# Altium PCB LV-BMS_V3_21E_low-side.PcbDoc (part 2 of 2)
Units mil, origin at the board's own origin, x right, y up, seen from the top; angles counter-clockwise.
Board outline 4867.15 x 1737.62 mil, 4 copper layers (Top Layer, GND, VCC, Bottom Layer), stack 30.634 mil thick; 153 components, 77 nets, 862 pads, 75 vias.
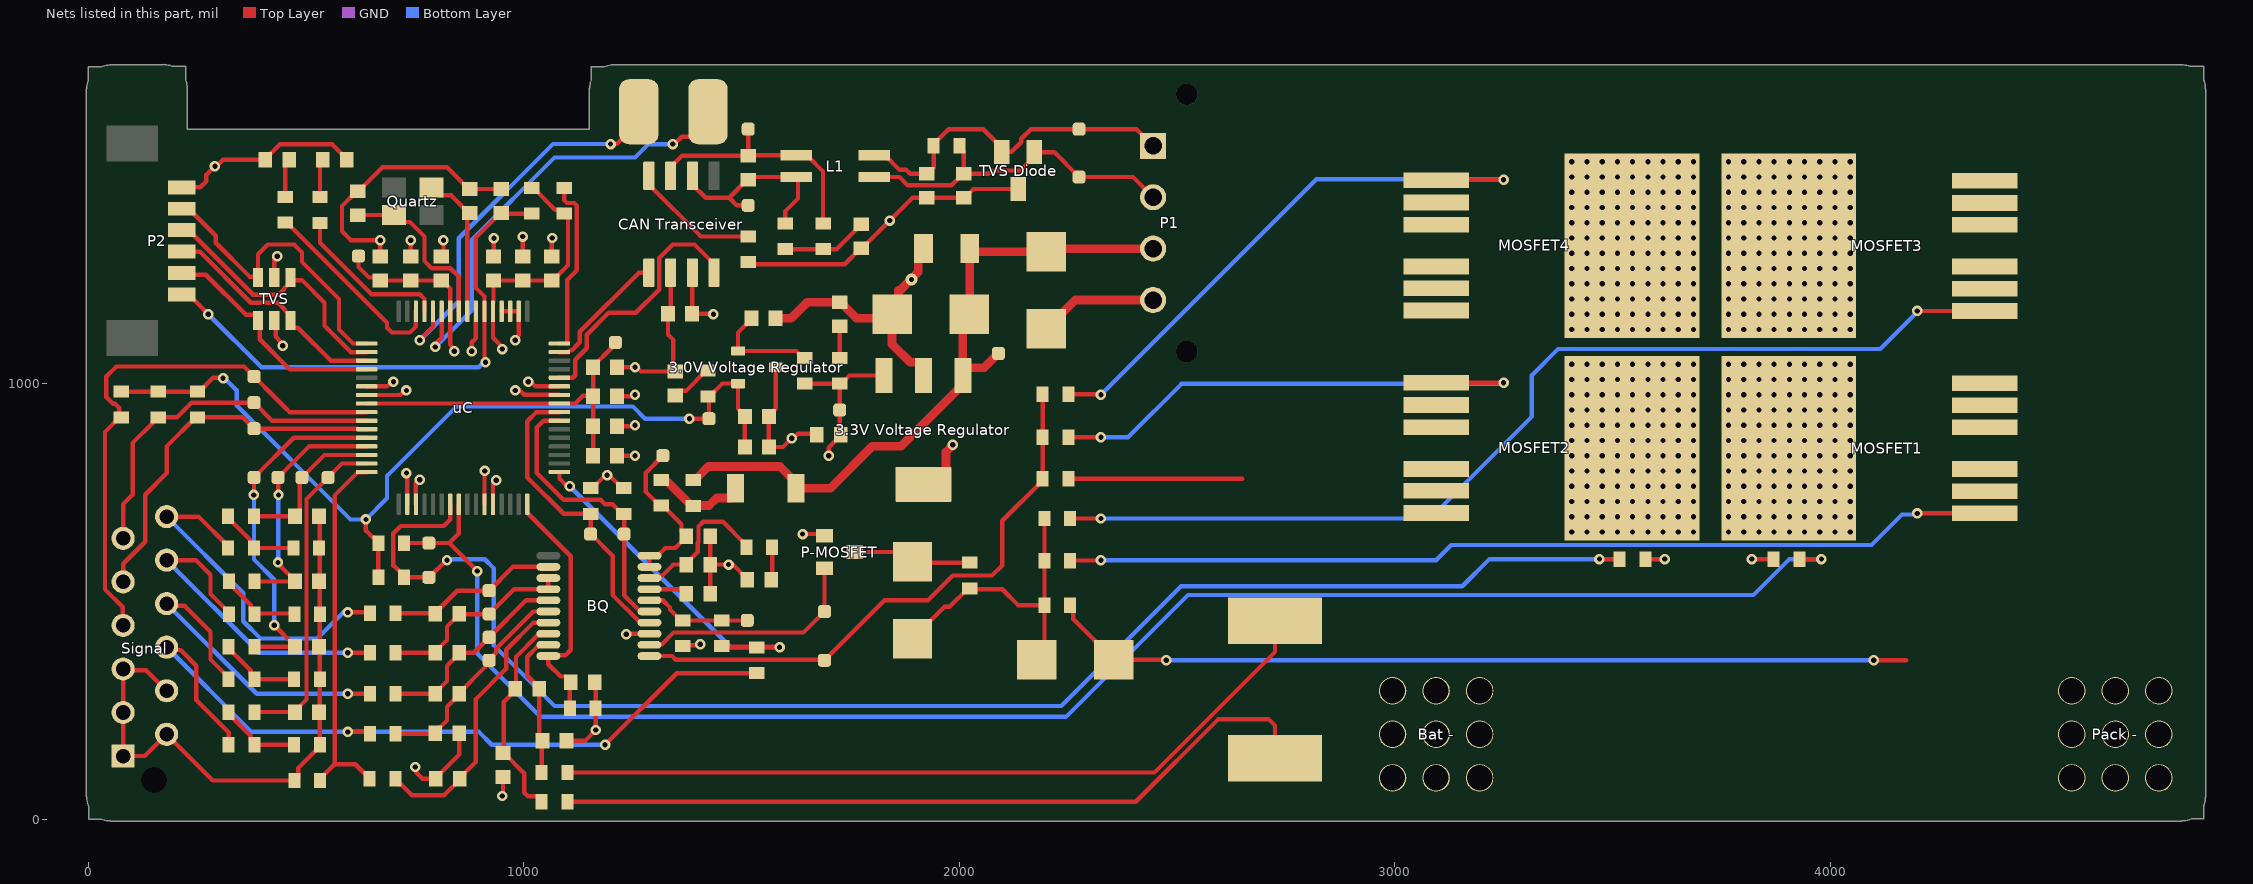
[diagram p4: the nets of this part, all layers, seen from the top]

## Via types
v1: diameter 24, hole 12, Top Layer to Bottom Layer, 74 vias
v2: diameter 28, hole 12, Top Layer to Bottom Layer, 1 vias

## Nets (pads, with @x,y where several pads share a name; then routed paths per layer and width w, separated by ;. In a path a pad name is that pad's centre, name@x,y a point inside that pad or via, vN(x,y) a via of type N, cw(c..) or ccw(c..) an arc to the next point about the centre after c; other vN are vias at no path point)
+3V3: 3V3.1 "3.3V Voltage Regulator.3" "CAN Transceiver.3" C4.2 C11.2 C18.1 C19.1 C20.1 C21.1 C22.1 C23.1 R21.1 R24.2 R25.1 R26.1 R44.1 R45.1 TP9.1 TVS.5 uC.2 uC.11 uC.26 uC.37 uC.42 uC.54 | length 1977
  Top Layer w10: TVS.5@426.53,1145.79 429.46,1142.85 429.46,1109.13 434.81,1103.79 434.81,1102.38 445.77,1091.42 v1(445.77,1087.63) ; 3V3.1@619.79,1293.47 619.79,1268.43 644.01,1244.21 663.23,1244.21 C23.1@670,1237.44 C20.1@740,1237.44 C19.1@810,1237.44 811.97,1237.44 830.47,1218.94 uC.42@830.47,1166.46 ; uC.54@638.54,994.21 685.42,994.21 696.21,1005 v1(700,1005) ; v1(730,795) 732.05,792.95 uC.2@732.05,723.54 ; uC.42@830.5,1166.43 830.5,1089.5 840,1080 v1(840,1075) ; uC.11@909.21,723.54 909.21,794.67 910,795.46 v1(910,800) ; v1(950,1079.88) 950,1084.76 928.9,1105.86 uC.37@928.9,1166.46 928.9,1185.98 930,1187.09 C22.1@930,1237.44 C21.1@997,1237.44 C18.1@1064,1237.44 1065.97,1237.44 1100.98,1272.46 1100.98,1382.64 1084.05,1399.58 1072.04,1399.58 1021.76,1449.85 R25.1@1017.83,1449.85 ; v1(980,985) 990.63,985 1000.63,975 1059.57,975 1059.96,974.61 1081.38,974.61 uC.26@1081.46,974.53 ; R44.1@1153.29,760.56 1157.23,760.56 1183.99,787.32 1188.09,787.32 v1(1190.77,790) 1193.45,787.32 1198.85,787.32 1225.61,760.56 R45.1@1229.55,760.56 ; 1386.69,1255.34 1386.69,1162.06 C4.2@1385.8,1161.16 1433.84,1161.16 v1(1435,1160) ; R24.2@1645,1000.47 R21.1@1725,1000.47 ; v1(1700,835) 1700,853.55 1727.56,881.11 C11.2@1727.56,883.08 1725,885.64 TP9.1@1725,940 R21.1@1725,1000.47 ; 1826.91,1019.18 1747.65,1019.18 1728.94,1000.47 R21.1@1725,1000.47
Bat_GND: R14.1 R50.2 uC.64 | length 860.7
  Top Layer w10: R14.1@531.71,89 531.71,92.94 565,126.23 ; uC.64@638.54,797.36 619.02,797.36 565,743.35 565,126.23 ; R50.2@645.61,93.16 645.61,97.1 636.83,105.88 632.89,105.88 612.54,126.23 565,126.23
Bat_VCC: "3.3V Voltage Regulator.1" C10.2 D1.2 D_feedback.2 Diode1.2 P1.3 R39.2 TP18.1 | length 1591.7
  Top Layer w20: R39.2@1388.56,779.03 1392.34,782.81 1396.28,782.81 1423.47,810 1587.87,810 1624.31,773.56 Diode1.2@1624.31,760.56 1704.14,760.56 1800,856.42 1865.91,856.42 2008.01,998.51 2008.01,1019.18 2008.01,1027.03 2017.69,1036.72 2056.72,1036.72 TP18.1@2090,1070 ; 2008.01,1039.85 2008.01,1145.41 D1.2@2022.6,1160 2023.76,1161.16 C10.2@2023.76,1310.62 2030.79,1303.58 D_feedback.2@2200,1303.58 2207.04,1310.62 P1.3@2445.14,1310.62
CAN_High: "TVS Diode.2" C2.2 CANH.1 L1.4 P1.1 R1.2 | length 802
  Top Layer w10: L1.4@1804.57,1525 1829.17,1525 1862.69,1491.49 1878.18,1491.49 1887.1,1482.56 C2.2@1925,1482.56 1926.97,1482.56 1941.08,1496.67 R1.2@1941.08,1546.84 1941.08,1550.78 1975.3,1585 2054.76,1585 2097.6,1542.17 2097.6,1532.32 2098.31,1533.04 2120,1533.04 2142.12,1555.16 2142.12,1562.88 2164.25,1585 CANH.1@2275,1585 2406.98,1585 P1.1@2445.14,1546.84
CAN_Low: "TVS Diode.1" C3.2 CANL.1 L1.3 P1.2 R1.1 | length 797.3
  Top Layer w10: L1.3@1804.57,1475 1862.28,1475 1881.47,1455.81 1981.28,1455.81 2008.03,1482.56 C3.2@2010,1482.56 ; R1.1@2000.13,1546.84 2000.13,1542.9 2010,1533.04 C3.2@2010,1482.56 ; P1.2@2445.14,1428.73 2398.87,1475 CANL.1@2275,1475 2217.68,1532.32 2172.4,1532.32 2172.4,1522.48 2139.92,1490 2075.08,1490 2067.64,1482.56 C3.2@2010,1482.56
Cell_1_AFE: R17.2 R47.2 R54.2 Signal.6 | length 1868.3
  Top Layer w10: Signal.6@179.13,395.12 185.66,388.59 211.41,388.59 247.37,352.63 247.37,273.58 321.84,199.11 R17.2@321.84,171.16 ; v1(595,200.59) 639.11,200.59 644.58,195.12 R47.2@645.74,196.28 ; v1(1186.29,171.16) 1350.6,335.47 R54.2@1535,335.47
  Bottom Layer w10: Signal.6@179.13,395.12 179.5,395.12 374.03,200.59 v1(595,200.59) 896.6,200.59 926.03,171.16 v1(1186.29,171.16)
Cell_2_Backup: R7.2 R46.2 Signal.8 | length 806.8
  Top Layer w10: Signal.8@179.13,495.12 184.23,490.02 220.71,490.02 280.01,430.71 280.01,366.93 313.06,333.88 321.84,325.1 R7.2@321.84,321.16 ; v1(595,288.13) R46.2@645.74,288.13
  Bottom Layer w10: Signal.8@179.13,495.12 386.12,288.13 v1(595,288.13)
Cell_3_Backup: R15.2 R41.2 Signal.10 | length 777.4
  Top Layer w10: Signal.10@179.13,595.12 179.25,595 246.49,595 280.01,561.48 280.01,517.4 322.32,475.1 R15.2@322.32,471.16 ; v1(595,382.34) R41.2@645.74,382.34
  Bottom Layer w10: Signal.10@179.13,595.12 391.91,382.34 v1(595,382.34)
Cell_4_Backup: R5.2 R38.2 Signal.12 | length 819.3
  Top Layer w10: Signal.12@179.13,695.12 252.35,695.12 320.45,627.02 R5.2@320.45,623.08 ; v1(595,475.1) 644.01,475.1 R38.2@645.74,473.37
  Bottom Layer w10: Signal.12@179.13,695.12 355,519.25 355,455 395,415 525,415 585.1,475.1 v1(595,475.1)
Cell_Temp_1: R9.1 Signal.7 T1.1 uC.57 | length 1275
  Top Layer w10: Signal.7@79.13,445.12 78.76,445.49 78.76,486.69 37.56,527.9 37.56,889.44 71.2,923.08 R9.1@75.13,923.08 70,928.21 70,945 60.6,954.4 55.82,954.4 40.53,969.69 40.53,1016.78 63.75,1040 356.79,1040 451.79,945 461.63,935.16 uC.57@638.54,935.16
Cell_Temp_2: R10.1 Signal.9 T2.1 uC.59 | length 850.8
  Top Layer w10: Signal.9@79.13,545.12 79.5,545.49 79.5,586.69 130,637.19 130,745.54 179.13,794.67 179.13,856.02 246.2,923.08 R10.1@250.13,923.08 353.71,923.08 T2.1@379.81,896.98 617.83,896.98 619.02,895.79 uC.59@638.54,895.79
Cell_Temp_3: R11.1 Signal.11 T3.1 uC.58 | length 823.5
  Top Layer w10: Signal.11@79.13,645.12 79.13,723.61 101.06,745.54 101.06,864.01 147.42,910.36 147.42,914.3 156.2,923.08 R11.1@160.13,923.08 203.08,923.08 236.98,956.98 T3.1@379.81,956.98 421.32,915.47 uC.58@638.54,915.47
GND: "3.0V Voltage Regulator.3" "3.3V Voltage Regulator.2" "3.3V Voltage Regulator.4" "Bat -.1" "CAN Transceiver.2" "R_Shunt 300uR.1" "TVS Diode.3" BQ.3 BQ_NTC.2 C2.1@1925,1427.44 C3.1@2010,1427.44 C4.1@1330.68,1161.16 C5.1 C6.1 C7.1 C8.1 C9.1 C10.1 C11.1 C12.1 C13.1 C14.1 C15.2 C16.2 C17.2 C18.2 C19.2 C20.2 C21.2 C22.2 C23.2 C24.2 C25.2 C26.2 C27.2 C34.1 C35.2 C36.2 C37.2 C38.1 C39.2 C41.1 C_Alert.2 CHG_NTC.2 D1.1 DSG_NTC.2 LED_1.2 LED_2.2 LED_3V3.2 LED_3V.2 LED_REGOUT.2 P2.1 P-MOSFET.1 R4.1 R12.1 R13.1 R14.2 R19.1 R20.1 R51.2 R_Alert.2 Signal.1 Signal.2 Signal.3 Signal.4 Signal.5 TVS.2 uC.3 uC.12 uC.27 uC.34 uC.35 uC.36 uC.39 uC.55 | length 8254.1
  Top Layer w10: Signal.4@179.13,295.12 132.38,341.87 82.38,341.87 Signal.5@79.13,345.12 Signal.3@79.13,245.12 Signal.1@79.13,145.12 129.13,145.12 Signal.2@179.13,195.12 285.25,89 R14.2@472.65,89 481.43,97.78 481.43,117.76 530.9,167.22 R20.1@530.9,171.16 R13.1@530.9,321.16 530.9,694.19 C6.1@528.93,696.16 ; P2.1@214.17,1451.46 256.46,1451.46 270,1465 270,1480 288.03,1498.03 291.82,1498.03 308.79,1515 LED_2.2@405.83,1515 405.83,1516.97 438.86,1550 559.53,1550 592.56,1516.97 LED_1.2@592.56,1515 ; TVS.2@426.53,1244.21 426.53,1286.04 433.39,1292.9 v1(433.39,1293) ; uC.55@638.54,974.53 715.74,974.53 726.21,985 v1(730,985) ; C23.2@670,1292.56 v1(670,1330) 602.44,1330 582.05,1350.39 582.05,1408.63 615.86,1442.44 C16.2@617.83,1442.44 619.79,1442.44 674.82,1497.46 823.13,1497.46 873.03,1447.56 C17.2@875,1447.56 C15.2@948,1447.56 ; C20.2@740,1292.56 v1(740,1330) ; v1(750,120) 752.68,117.32 752.68,107.32 766.84,93.16 C38.1@797.58,93.16 797.58,95.13 851.1,148.65 C34.1@851.1,197.77 ; uC.3@751.73,723.54 751.73,771.73 759.79,779.79 v1(760.41,779.79) ; C19.2@810,1292.56 815,1297.56 v1(815,1330) ; v1(880,1075) 880,1095.46 889.53,1104.98 uC.39@889.53,1166.46 ; uC.12@928.9,723.54 928.9,772.46 935.07,778.63 v1(936.44,778.63) ; C22.2@930,1292.56 930.91,1293.47 v1(930.91,1334.33) ; uC.36@948.58,1166.46 uC.35@968.27,1166.46 uC.34@987.95,1166.46 987.95,1111.74 980,1103.79 v1(980,1100) ; v1(950,53.38) 951.85,55.23 C39.2@951.85,97.06 ; C21.2@997,1292.56 v1(997,1338.41) ; v1(1010,1005) 1015.6,1005 1026.39,994.21 uC.27@1081.46,994.21 ; C18.2@1064,1292.56 1064,1333 1065,1334 v1(1065,1335) ; C41.1@1097.73,179.94 1139.94,179.94 1164.76,204.76 1164.76,254.76 R_Alert.2@1164.53,255 1164.53,313.03 C_Alert.2@1162.56,315 ; R51.2@1099.53,40 2405,40 2595,230 2710,230 2725,215 2725,140 ; C27.2@1213.85,835 v1(1255,835) ; C25.2@1213.85,903 1253,903 v1(1255,905) ; C24.2@1213.85,971.5 1251.5,971.5 v1(1255,975) ; C26.2@1213.85,1038.08 v1(1255,1038.08) 1258.79,1038.08 1268.63,1028.24 LED_3V.2@1347.49,1028.24 1343.21,1032.51 1343.21,1100.63 1330.68,1113.17 C4.1@1330.68,1161.16 1336.69,1167.17 1336.69,1255.34 ; v1(1235,425) 1236.04,426.04 BQ.3@1288.23,426.04 ; BQ_NTC.2@1364.53,397.56 1366.68,399.71 1402.85,399.71 v1(1405,401.86) ; C37.2@1427.56,518 C36.2@1427.56,585 ; C35.2@1427.56,650 C36.2@1427.56,585 ; LED_REGOUT.2@1512.91,550 1512.91,551.97 1479.88,585 v1(1470,585) C36.2@1427.56,585 ; R4.1@1515,1279.36 1519.36,1275 1736.59,1275 1773.03,1311.44 C5.1@1775,1311.44 1776.97,1311.44 1787.72,1322.19 1787.72,1322.87 v1(1839.92,1375.08) 1892.28,1427.44 C2.1@1925,1427.44 C3.1@2010,1427.44 2011.97,1427.44 2032.2,1447.68 2135,1447.68 ; 1578.31,1038.08 1578.31,942.72 1562.56,926.97 C13.1@1562.56,925 C14.1@1562.56,855 1595,855 v1(1615,875) 1618.79,875 1629.43,885.64 1669.88,885.64 C11.1@1672.44,883.08 ; v1(1640,655) 1686.28,655 P-MOSFET.1@1690.16,651.12 ; CHG_NTC.2@3575.53,597.48 v1(3620,597.48) ; v1(3820,597.48) DSG_NTC.2@3870.47,597.48
  Top Layer w20: C12.1@1577.56,1150.63 1613.54,1150.63 1650.47,1187.56 LED_3V3.2@1725,1187.56 1726.97,1187.56 1763.9,1150.63 1843.46,1150.63 D1.1@1845.43,1148.66 ; C10.1@1905.8,1327.31 1917.46,1315.66 C10.1@1917.46,1310.62 ; 1917.46,769.18 1939.06,769.18 1969.42,799.54 1969.42,843.33 1985,858.92 v1(1985,860) ; 1917.46,1019.18 1917.46,1039.85 1907.77,1049.54 1887.1,1049.54 1845.43,1091.21 D1.1@1845.43,1148.66 ; C10.1@1925,1318.16 C10.1@1917.46,1310.62 ; D1.1@1845.43,1148.66 D1.1@1845.43,1160 1860,1174.57 1860,1215 1863.92,1215 1888.92,1240 v2(1890,1240) 1890,1241.08 1905.8,1256.89 1905.8,1298.97 C10.1@1917.46,1310.62
  GND w10: v1@950,46.75 v1(950,53.38)
  other v1: 1165,205 290,1500
LED1: R29.1 uC.45 | length 367.9
  Top Layer w10: R29.1@531.37,1370.05 531.37,1324 649.68,1205.68 760.41,1205.68 771.42,1194.68 uC.45@771.42,1166.46
LED2: R30.1 uC.46 | length 451.4
  Top Layer w10: R30.1@451.79,1370.08 455.72,1370.08 685.42,1140.38 685.42,1129.13 696.64,1117.91 737.93,1117.91 751.65,1131.64 751.65,1166.38 uC.46@751.73,1166.46
Net1V2_1: 1V2.1 C24.1 C25.1 C26.1 C27.1 uC.25 uC.56 | length 809.1
  Top Layer w10: uC.56@638.54,954.84 uC.25@1081.46,954.84 1117.87,954.84 1135.5,972.48 1157.75,972.48 C24.1@1158.73,971.5 ; C27.1@1158.73,835 C25.1@1158.73,903 C24.1@1158.73,971.5 ; 1V2.1@1210,1095 1201.54,1086.54 1201.54,1082.86 1158.73,1040.05 C26.1@1158.73,1038.08 C24.1@1158.73,971.5
"Net3.0V Voltage Regulator_1": "3.0V Voltage Regulator.1" C12.2 R24.1 | length 247.8
  Top Layer w10: C12.2@1522.44,1150.63 1522.44,1148.66 1491.69,1117.91 1491.69,1075.48 1625.11,1075.48 1641.06,1059.53 R24.1@1645,1059.53
"Net P-MOSFET_3": D2.1 P-MOSFET.3 R31.1 | length 274
  Top Layer w10: P-MOSFET.3@1759.84,613.72 1869.96,613.72 D2.1@1892.28,591.4 1894.43,589.25 R31.1@2023.76,589.25
NetBQ_7: BQ.7 C37.1 | length 88.5
  Top Layer w10: BQ.7@1288.23,528.4 1362.04,528.4 C37.1@1372.44,518
NetBQ_17: BQ.17 C38.2 R50.1 | length 645.9
  Top Layer w10: R50.1@704.66,93.16 704.66,89.22 713.44,80.44 717.38,80.44 742.82,55 816.5,55 852.69,91.19 C38.2@852.69,93.16 852.69,95.13 889.53,131.96 889.53,276.19 959.27,345.94 959.27,389.27 1021.63,451.63 BQ.17@1055.94,451.63
NetBQ_18: BQ.18 C39.1 C40.2 R51.1 | length 493
  Top Layer w10: C39.1@953.49,153.81 C39.1@953.33,153.65 ; R51.1@1040.47,40 1040.47,43.94 1031.69,52.72 1009,52.72 1000.63,61.09 1000.63,105.36 953.82,152.18 C39.1@951.85,152.18 C39.1@953.33,153.65 ; BQ.18@1055.94,426.04 1035.16,426.04 1029.42,420.31 1029.02,420.31 981.56,372.85 981.56,301.48 969.33,289.25 969.33,285.48 953.33,269.47 C39.1@953.33,153.65
NetBQ_19: BQ.19 C40.1 C41.2 R52.1 | length 340.9
  Top Layer w10: R52.1@1040.47,107.32 1040.47,177.8 C41.2@1042.62,179.94 1035.2,187.36 C40.1@1035.2,300 1035.2,301.97 1007.64,329.53 1007.64,373.34 1029.02,394.72 1029.42,394.72 1035.16,400.45 BQ.19@1055.94,400.45
NetBQ_20: BQ.20 C_Alert.1 R_Alert.1 uC.16 | length 582.3
  Top Layer w10: uC.16@1007.64,723.54 1007.64,704.02 1107.44,604.21 1107.44,389.27 1094.51,376.34 1057.42,376.34 BQ.20@1055.94,374.86 1055.94,356.1 1084.33,327.72 1096.69,327.72 1107.44,316.97 C_Alert.1@1107.44,315 1105.47,313.03 R_Alert.1@1105.47,255
NetC1_1: "CAN Transceiver.6" C1.1@1515,1469.11 L1.2 R2.2 TP2.1 | length 462.1
  Top Layer w10: 1386.69,1477.78 1386.69,1458.09 1417.35,1427.44 1471.36,1427.44 ; TP2.1@1515,1410 1488.8,1410 1471.36,1427.44 ; R2.2@1600.35,1368.33 1600.35,1396.81 1629.43,1425.88 1629.43,1471.01 L1.2@1625.43,1475 1520.89,1475 C1.1@1515,1469.11 1513.03,1469.11 1471.36,1427.44
NetC1_2: "CAN Transceiver.7" C1.2 L1.1 R3.2 TP1.1 | length 577.2
  Top Layer w10: 1336.69,1477.78 1336.69,1497.46 1363.46,1524.23 C1.2@1515,1524.23 ; TP1.1@1515,1585 C1.2@1515,1524.23 ; R3.2@1686.94,1368.33 1686.94,1488.09 1650.04,1525 L1.1@1625.43,1525 1515.77,1525 C1.2@1515,1524.23
NetC1_uC_1: C1.1@550,785 C9.2 R18.1 uC.63 | length 765.1
  Top Layer w10: R18.1@380.9,246.16 C9.2@473.81,246.16 473.81,248.13 500.56,274.88 500.56,735.56 C1.1@550,785 582.05,817.05 uC.63@638.54,817.05
NetC2_uC_1: C2.1@380,785 C7.2 R8.1 uC.60 | length 817.3
  Top Layer w10: v1(379.5,745) 379.75,745.25 379.75,784.75 C2.1@380,785 471.1,876.1 uC.60@638.54,876.1 ; R8.1@380.9,396.16 C7.2@473.81,396.16 473.81,398.13 426.53,445.41 v1(426.53,445.49)
  Bottom Layer w10: v1(379.5,745) 380,744.5 380,596.82 426.53,550.29 v1(426.53,445.49)
NetC3_uC_1: C3.1@435,785 C8.2 R16.1 uC.61 | length 581.4
  Top Layer w10: R16.1@381.37,546.16 C8.2@473.81,546.16 473.81,548.13 442.15,579.79 442.15,581.79 435,588.93 v1(435,590) ; v1(436.08,745) 435.54,745.54 435.54,784.46 C3.1@435,785 506.42,856.42 uC.61@638.54,856.42
  Bottom Layer w10: v1(435,590) 435.54,590.54 435.54,744.46 v1(436.08,745)
NetC4_uC_1: C4.1@490,785 C6.2 R6.1 uC.62 | length 359.8
  Top Layer w10: R6.1@379.5,696.16 C6.2@473.81,696.16 484.56,706.91 484.56,779.56 C4.1@490,785 541.73,836.73 uC.62@638.54,836.73
NetC5_2: C5.2 R2.1 R3.1 | length 202.6
  Top Layer w10: R2.1@1600.35,1309.27 R3.1@1686.94,1309.27 1717.72,1309.27 1762.28,1353.84 1762.28,1355.81 1773.03,1366.56 C5.2@1775,1366.56 C5.2@1777.17,1368.73
NetC16_1: C16.1 Quartz.1 uC.41 | length 404
  Top Layer w10: C16.1@617.83,1387.32 618.31,1387.8 Quartz.1@701.21,1387.8 717.07,1371.95 737.93,1371.95 771.42,1338.46 771.42,1282.12 787.73,1265.81 830.65,1265.81 850.16,1246.3 uC.41@850.16,1166.46
NetC17_1: C17.1 Quartz.3 uC.40 | length 339.6
  Top Layer w10: Quartz.3@787.83,1450.8 805.46,1433.16 832.57,1433.16 850.16,1415.58 850.16,1415.31 873.03,1392.44 C17.1@875,1392.44 869.84,1387.28 uC.40@869.84,1166.46
"NetCAN Transceiver_1": "CAN Transceiver.1" uC.31 | length 295
  Top Layer w10: uC.31@1081.46,1072.95 1100.98,1072.95 1104.75,1076.72 1109.47,1076.72 1128.15,1095.4 1128.15,1119.64 1263.84,1255.34 1286.69,1255.34
"NetCAN Transceiver_4": "CAN Transceiver.4" uC.28 | length 601.7
  Top Layer w10: uC.28@1081.46,1013.9 1081.54,1013.98 1112.01,1013.98 1117.87,1019.83 1117.87,1055.32 1144.15,1081.6 1144.15,1113.02 1194.36,1163.23 1256.82,1163.23 1310.49,1216.9 1310.49,1288.84 1341.65,1320 1391.72,1320 1436.69,1275.02 1436.69,1255.34
"NetCAN Transceiver_8": "CAN Transceiver.8" R4.2 | length 297.6
  Top Layer w10: 1286.69,1477.78 1286.69,1458.09 1406.37,1338.41 R4.2@1515,1338.41
NetCHG_NTC_1: CHG.1@781.42,555.56 CHG_NTC.1 R27.2 uC.7 | length 3483.8
  Top Layer w10: v1(823.13,595.12) 822.05,595.12 782.49,555.56 CHG.1@781.42,555.56 R27.2@724.48,555.56 724.48,559.5 702.19,581.79 700,581.79 699.7,582.09 699.7,656.61 716.72,673.63 815.51,673.63 830.47,688.59 uC.7@830.47,723.54 ; v1(3470,597.48) CHG_NTC.1@3516.47,597.48
  Bottom Layer w10: v1(823.13,595.12) 825.01,597 910,597 930.91,576.09 930.91,399.09 1070,260 2234.05,260 2509.05,535 3155,535 3217.48,597.48 v1(3470,597.48)
NetD2_2: D2.2 D3.2 R31.2 R35.1 R36.1 R40.1 | length 699
  Top Layer w10: D2.2@1892.28,414.23 1966.02,487.96 1977.58,487.96 2019.82,530.2 R31.2@2023.76,530.2 2025.55,528.4 2098.31,528.4 2134.88,491.84 R40.1@2195.47,491.84 ; D3.2@2177.51,366.35 2195.47,384.32 R40.1@2195.47,491.84 ; R36.1@2195.47,690.8 R35.1@2195.47,594.2 R40.1@2195.47,491.84
NetD3_1: "Pack -.1" D3.1 MOSFET1.3 MOSFET3.3 R40.2 | length 1987.9
  Top Layer w10: R40.2@2254.53,491.84 2261.91,484.46 2261.91,459.12 D3.1@2354.68,366.35 2473.65,366.35 v1(2475,365) ; v1(4100,365) 4175,365
  Bottom Layer w10: v1(2475,365) v1(4100,365)
NetD_feedback_1: D_feedback.1 P1.4 | length 272.5
  Top Layer w20: D_feedback.1@2200,1126.42 2266.09,1192.51 P1.4@2445.14,1192.51
NetDiode1_1: Diode1.1 R37.2 R39.1 | length 219.4
  Top Layer w20: R37.2@1315,779.53 1318.78,775.75 1328.85,775.75 1384.62,719.98 R39.1@1388.56,719.98 1389.06,720.47 1425,720.47 1442.59,738.06 1475.81,738.06 1485.31,747.56 Diode1.1@1485.31,760.56
NetDSG_NTC_1: DSG.1@781.42,634.34 DSG_NTC.1 R28.2 uC.8 | length 3830.7
  Top Layer w10: R28.2@724.48,634.34 DSG.1@781.42,634.34 828.38,634.34 ; uC.8@850.16,723.54 850.16,656.12 828.38,634.34 ; v1(892.72,570) 828.38,634.34 ; DSG_NTC.1@3929.53,597.48 v1(3980,597.48)
  Bottom Layer w10: v1(892.72,570) 892.72,380.71 1038.43,235 2245,235 2525,515 3823.94,515 3906.42,597.48 v1(3980,597.48)
NetLED_1_1: LED_1.1 R29.2 | length 88.4
  Top Layer w10: R29.2@531.37,1429.1 531.37,1508.93 LED_1.1@537.44,1515
NetLED_2_1: LED_2.1 R30.2 | length 89.7
  Top Layer w10: R30.2@451.79,1429.13 451.79,1505.84 LED_2.1@460.95,1515
NetLED_3V3_1: LED_3V3.1 R21.2 | length 76.5
  Top Layer w10: R21.2@1725,1059.53 1727.56,1059.53 1725,1062.09 LED_3V3.1@1725,1132.44
NetLED_3V_1: LED_3V.1 R22.2 | length 98.9
  Top Layer w10: LED_3V.1@1347.49,973.12 1358.24,983.87 1371.94,983.87 1418.62,1030.55 R22.2@1422.56,1030.55
NetLED_REGOUT_1: LED_REGOUT.1 R23.2 | length 75.8
  Top Layer w10: LED_REGOUT.1@1568.03,550 1570,551.97 R23.2@1570,625
NetMOSFET1_1: MOSFET1.1 R35.2 | length 2145.3
  Top Layer w10: R35.2@2254.53,594.2 2324.05,594.2 2324.85,595 v1(2325,595) ; v1(4200,702.5) MOSFET1.1@4354.98,702.5
  Bottom Layer w10: v1(2325,595) 3095,595 3130,630 4095,630 4165,700 4197.5,700 v1(4200,702.5)
NetMOSFET1_2: MOSFET1.2 MOSFET2.2 MOSFET3.2 MOSFET4.2 pad.21 pad.22 pad.23 pad.24 pad.25 pad.28 pad.29 pad.30 pad.31
NetMOSFET2_1: MOSFET2.1 R33.2 | length 1206.5
  Top Layer w10: R33.2@2250.33,877.37 v1(2325,877.37) ; MOSFET2.1@3095,1002.52 v1(3250,1002.52)
  Bottom Layer w10: v1(2325,877.37) 2387.37,877.37 2510,1000 3247.48,1000 v1(3250,1002.52)
NetMOSFET2_3: "R_Shunt 300uR.2" MOSFET2.3 MOSFET4.3 R32.2 R52.2 | length 2211.6
  Top Layer w10: R52.2@1099.53,107.32 2448.01,107.32 2725,384.32 2725,456 ; R32.2@2250.33,782.24 2650,782.24
NetMOSFET3_1: MOSFET3.1 R36.2 | length 2355.1
  Top Layer w10: R36.2@2254.53,690.8 v1(2325,690.8) ; v1(4200,1167.5) MOSFET3.1@4354.98,1167.5
  Bottom Layer w10: v1(2325,690.8) 3080.8,690.8 3315,925 3315,1020 3375,1080 4115,1080 4200,1165 v1(4200,1167.5)
NetMOSFET4_1: MOSFET4.1 R34.2 | length 1361.1
  Top Layer w10: R34.2@2250.33,975.95 2324.05,975.95 v1(2325,975) ; MOSFET4.1@3095,1467.52 3096.26,1468.78 v1(3250,1468.78)
  Bottom Layer w10: v1(2325,975) 2820,1470 3248.78,1470 v1(3250,1468.78)
NetR5_1: R5.1 R6.2 R12.2 | length 188.5
  Top Layer w10: R6.2@320.45,696.16 320.45,692.22 370.72,641.95 370.72,631.86 R5.1@379.5,623.08 R12.2@470.45,623.08
NetR7_1: R7.1 R8.2 R13.2 | length 190.4
  Top Layer w10: R8.2@321.84,396.16 321.84,392.22 372.12,341.95 372.12,329.94 R7.1@380.9,321.16 R13.2@471.84,321.16
NetR15_1: R15.1 R16.2 R19.2 | length 191.5
  Top Layer w10: R16.2@322.32,546.16 322.32,542.22 372.59,491.95 372.59,479.94 R15.1@381.37,471.16 382.7,472.49 470.99,472.49 R19.2@472.32,471.16
NetR17_1: R17.1 R18.2 R20.2 | length 190.4
  Top Layer w10: R18.2@321.84,246.16 321.84,242.22 372.12,191.95 372.12,179.94 R17.1@380.9,171.16 R20.2@471.84,171.16
NetR26_2: R26.2 uC.32 | length 405.6
  Top Layer w10: uC.32@1081.46,1092.64 1099.02,1092.64 1099.09,1092.72 1099.09,1238.72 1121.54,1261.16 1121.54,1409.13 1115.1,1415.58 1098.68,1415.58 1092.83,1421.43 R26.2@1092.83,1449.85
NetR43_1: R43.1 R54.1 uC.17 | length 814.9
  Top Layer w10: uC.17@1081.46,797.36 1081.46,782.38 1098.84,765 v1(1105,765) ; R43.1@1454.53,397.56 1455.69,396.39 1535,396.39 1586.01,396.39 v1(1587.18,395.22)
  Bottom Layer w10: v1(1105,765) 1475,395 1586.95,395 v1(1587.18,395.22)
NetuC_43: uC.43 URX.1 | length 1043.4
  Top Layer w10: v1(795.98,1084.76) 795.98,1091.3 810.79,1106.11 uC.43@810.79,1166.46 ; v1(1341.65,1550.78) 1345.44,1550.78 1362.28,1567.63 1383.63,1567.63 1422.56,1606.56 URX.1@1422.56,1625
  Bottom Layer w10: v1(795.98,1084.76) 880,1168.78 880,1330 1070,1520 1255,1520 1285,1550 1340,1550 1340.78,1550.78 v1(1341.65,1550.78)
NetuC_44: uC.44 UTX.1 | length 898.7
  Top Layer w10: v1(760.41,1100) 760.41,1100.63 791.1,1131.33 uC.44@791.1,1166.46 ; v1(1198.85,1550.78) 1213.27,1550.78 1263.84,1601.35 UTX.1@1263.84,1625
  Bottom Layer w10: v1(760.41,1100) 850,1189.59 850,1334.33 1066.45,1550.78 v1(1198.85,1550.78)
"REGOUT +3.3V": BQ.8 C36.1 R23.1 | length 337.1
  Top Layer w10: BQ.8@1288.23,553.99 1309.02,553.99 1314.75,559.73 1317.94,559.73 1343.21,585 C36.1@1372.44,585 1372.44,586.97 1399.19,613.72 1399.19,635 1400.81,636.62 1400.81,672.27 1411.62,683.08 1456.8,683.08 1510.95,628.94 R23.1@1510.95,625
RST: C15.1 P2.6 R25.2 uC.38 | length 1219.4
  Top Layer w10: P2.6@214.17,1205.39 229.72,1205.39 270,1165.12 270,1165 v1(275,1160) ; v1(911.54,1049.54) 909.21,1051.87 uC.38@909.21,1166.46 909.21,1200.72 889.53,1220.41 889.53,1335.94 946.03,1392.44 C15.1@948,1392.44 949.64,1390.8 R25.2@1017.83,1390.8
  Bottom Layer w10: v1(275,1160) 396.92,1038.08 896.3,1038.08 907.76,1049.54 v1(911.54,1049.54)
TCK: P2.5 TVS.4 uC.52 | length 542.7
  Top Layer w10: P2.5@214.17,1254.61 217.97,1250.81 269.21,1250.81 361.37,1158.64 382.32,1158.64 389.13,1151.83 TVS.4@389.13,1145.79 392.92,1141.99 392.92,1102.29 461.63,1033.58 uC.52@638.54,1033.58
TDI: P2.3 TVS.1 uC.50 | length 611.5
  Top Layer w10: P2.3@214.17,1353.03 229.72,1353.03 376.75,1206.01 376.75,1205 436.34,1205 449.97,1218.63 449.97,1220.41 463.93,1234.37 TVS.1@463.93,1244.21 469.88,1238.26 490,1238.26 541.73,1186.53 541.73,1133.27 602.05,1072.95 uC.50@638.54,1072.95
TDO: P2.2 TVS.3 uC.49 | length 709.9
  Top Layer w10: P2.2@214.17,1402.24 229.72,1402.24 291.82,1340.15 291.82,1324 369.51,1246.3 387.03,1246.3 TVS.3@389.13,1244.21 389.13,1297.53 411.6,1320 471.93,1320 490,1301.93 490,1280 575,1195 575,1125 607.28,1092.72 638.46,1092.72 uC.49@638.54,1092.64
TMS: P2.4 TVS.6 uC.51 | length 540.7
  Top Layer w10: P2.4@214.17,1303.82 255.3,1303.82 372.59,1186.53 434.81,1186.53 449.97,1171.37 449.97,1169.59 463.93,1155.63 TVS.6@463.93,1145.79 463.93,1135.94 470.74,1129.13 480.58,1129.13 556.45,1053.27 uC.51@638.54,1053.27
TP_AFE_BAT: "AFE BAT.1" BQ.9 BQ.10 C35.1 R37.1 | length 373.6
  Top Layer w10: BQ.9@1288.23,579.59 BQ.10@1288.23,605.18 1306.93,605.18 1324.83,623.08 1347.49,623.08 1372.44,648.03 C35.1@1372.44,650 1361.69,660.75 1361.69,677.72 1318.94,720.47 R37.1@1315,720.47 1311.06,720.47 1280,751.54 1280,796.06 1318.94,835
TP_Cell_1: BQ.16 C1.1@920,365 C32.1 C34.2 R47.1 | length 499.1
  Top Layer w10: R47.1@704.8,196.28 794.48,196.28 C34.2@795.98,197.77 795.98,199.74 823.13,226.89 823.13,258.19 851.1,286.16 C32.1@851.1,288.13 851.1,290.1 911.54,350.54 911.54,356.54 C1.1@920,365 920,366.35 936.44,382.8 936.44,392.22 1021.44,477.22 BQ.16@1055.94,477.22
TP_Cell_2: BQ.15 C2.1@920,418 C31.1 C32.2 R46.1 | length 463
  Top Layer w10: R46.1@704.8,288.13 C32.2@795.98,288.13 795.98,290.1 823.13,317.24 823.13,352.4 851.1,380.37 C31.1@851.1,382.34 884.34,382.34 C2.1@920,418 1004.81,502.81 BQ.15@1055.94,502.81
TP_Cell_3: BQ.13 BQ.14 C3.1@920,471.16 C29.1 C31.2 R41.1 | length 458.7
  Top Layer w10: R41.1@704.8,382.34 C31.2@795.98,382.34 795.98,384.31 823.13,411.46 823.13,442.4 851.1,470.37 C29.1@851.1,472.34 852.28,471.16 C3.1@920,471.16 977.24,528.4 BQ.14@1055.94,528.4 BQ.13@1055.94,553.99
TP_Cell_4: BQ.12 C4.1@920,525 C29.2 R38.1 | length 397.3
  Top Layer w10: R38.1@704.8,473.37 794.95,473.37 C29.2@795.98,472.34 795.98,474.31 846.67,525 C4.1@920,525 974.79,579.79 1055.74,579.79 BQ.12@1055.94,579.59
TP_CHG: BQ.2 CHG.1@1690.16,477.22 P-MOSFET.2 | length 532.8
  Top Layer w10: BQ.2@1288.23,400.45 1289.7,401.93 1316.76,401.93 1343.69,428.86 1641.8,428.86 CHG.1@1690.16,477.22 P-MOSFET.2@1690.16,576.32
TP_DSG: BQ.1 DSG.1@1690.16,365 R32.1 R33.1 R34.1 | length 1336
  Top Layer w10: BQ.1@1288.23,374.86 1340.17,374.86 1348.68,366.35 1688.8,366.35 DSG.1@1690.16,365 1827.97,502.81 1928.09,502.81 1985,559.73 2075.08,559.73 2098.31,582.96 2098.31,685.34 2191.28,778.3 R32.1@2191.28,782.24 R33.1@2191.28,877.37 R34.1@2191.28,975.95
TP_SCL: BQ.5 R45.2 SCL.1 uC.23 | length 663
  Top Layer w10: uC.23@1081.46,915.47 1045,915.47 1029.42,899.9 1029.42,795.38 1091.36,733.44 1176.39,733.44 1186.29,723.54 1203.57,723.54 1225.61,701.5 R45.2@1229.55,701.5 1230,701.05 SCL.1@1230,655 1230,514.26 1261.3,482.96 1261.71,482.96 1267.44,477.22 BQ.5@1288.23,477.22
TP_SDA: BQ.4 R44.2 SDA.1 uC.24 | length 710.9
  Top Layer w10: uC.24@1081.46,935.16 1028.5,935.16 1007.64,914.3 1007.64,785 1091.13,701.5 R44.2@1153.29,701.5 1153,701.21 SDA.1@1153,655 1153.75,655 1203.57,605.18 1203.57,515.09 1261.3,457.36 1261.71,457.36 1267.44,451.63 BQ.4@1288.23,451.63
TP_TS1: BQ.6 BQ_NTC.1 R43.2 TS1.1 | length 246.5
  Top Layer w10: BQ.6@1288.23,502.81 1318.94,502.81 1335.37,486.38 1335.37,481.83 1360.59,456.61 BQ_NTC.1@1364.53,456.61 R43.2@1454.53,456.61 TS1.1@1512.91,456.61
V_REF: "3.0V Voltage Regulator.2" C13.2 C14.2 R9.2 R10.2 R11.2 R22.1 R27.1 R28.1 TP10.1 | length 2100.5
  Top Layer w10: R9.2@75.13,982.13 R11.2@160.13,982.13 R10.2@250.13,982.13 254.07,982.13 285.83,1013.9 307.89,1013.9 v1(308.79,1013) ; v1(636.83,688.59) 636.83,662.94 652.71,647.06 656.65,647.06 665.43,638.28 R28.1@665.43,634.34 R27.1@665.43,555.56 ; v1(1380,920) TP10.1@1425,920 1425,969.06 R22.1@1422.56,971.5 1426.5,971.5 1455.68,1000.68 1491.69,1000.68 1491.69,942.72 1507.44,926.97 C13.2@1507.44,925 C14.2@1507.44,855
  Bottom Layer w10: v1(308.79,1013) 312,1013 340,985 340,950.12 601.53,688.59 v1(636.83,688.59) 685.42,737.19 685.42,788.61 844.82,948 1250.18,948 1278.18,920 v1(1380,920)
pads on no net: "CAN Transceiver.5" BQ.11 P1.MH1 P1.MH2 P2.MP1 P2.MP2 Quartz.2 Quartz.4 Signal.MH1 uC.1 uC.4 uC.5 uC.6 uC.9 uC.10 uC.13 uC.14 uC.15 uC.18 uC.19 uC.20 uC.21 uC.22 uC.29 uC.30 uC.33 uC.47 uC.48 uC.53

## Polygon pours and split planes (outlines as drawn)
NetMOSFET1_2 on Top Layer "NETMOSFET1_2_L01_P005" (solid, remove dead copper, pour order 5): 3350,1565 3350,505 4100,505 4100,1565
GND on Top Layer "GND_L01_P006" (solid, remove dead copper, pour order 6): -0.9,1727.56 6.54,1735 2550,1735 2550,-5 2544.66,0.34 -0.12,0.34
NetD3_1 on Top Layer "NETD3_1_L01_P003" (solid, remove dead copper, pour order 3): 4150,1735 4150,1195 4435,1195 4445,1185 4445,1150 4435,1140 4150,1140 4150,730 4435,730 4445,720 4445,685 4430,670 4150,670 4150,0 4151.11,1.11 4861.16,1.11 4861.16,1725.14 4857.75,1728.55
GND on Top Layer "GND_L01_P001" (solid, remove dead copper, pour order 1): 2600,190 2605,195 2795,195 2835,235 2950,350 3275,350 3275,25 2600,25
NetMOSFET2_3 on Top Layer "NETMOSFET2_3_L01_P000" (solid, remove dead copper, pour order 0): 2600,400 2600,1735 3275,1735 3275,1500 3017.59,1500.15 3000,1482.56 3000,1455 3015,1440 3275,1440 3275,1035 3015,1035 3005,1025 3005,982.52 3012.52,975 3275,975 3275,400
GND on GND "GND_L02_P007" (solid, remove dead copper, pour order 7): -0.9,1730.09 -0.9,1.11 -0.12,0.34 0.65,1.11 4861.16,1.11 4861.16,1725.14 4857.75,1728.55
NetD3_1 on VCC "NETD3_1_L03_P009" (solid, remove dead copper, pour order 9): 2600,1735 2600,0 2600.77,0.77 4861.04,0.77 4861.04,1725.16 4857.1,1729.11
+3V3 on VCC "+3V3_L03_P008" (solid, remove dead copper, pour order 8): 2545,1735 2555,1725 2555,0 13.24,0 0.59,12.64 0.59,1727.82
GND on Bottom Layer "GND_L04_P010" (solid, remove dead copper, pour order 10): -0.78,1727.89 1.15,1725.97 1.15,0.98 4861.03,0.98 4861.16,1.11 4857.75,4.53 4857.75,1728.55

## Keep-outs
Top Layer:
  lines w1: -0.38,1727.56 0.13,1728.08
Keep-Out Layer:
  lines w1: -0.38,1683.05 -0.38,1727.56 ; -0.12,1727.82 44.39,1727.82 ; 0.13,1678.08 cw(c50.13,1678.08) 50.13,1728.08 ; 0.63,51.5 ccw(c50.63,51.5) 50.63,1.5 ; 0.89,1.24 0.89,45.75 ; 1.15,0.98 45.66,0.98 ; 171.74,1729.06 cw(c171.74,1679.06) 221.74,1679.06 ; 176.72,1729.58 221.23,1729.58 ; 222,1684.81 222,1729.32 ; 1154.62,1683.05 1154.62,1727.56 ; 1154.88,1727.82 1199.39,1727.82 ; 1155.13,1678.08 cw(c1205.13,1678.08) 1205.13,1728.08 ; 4807.02,0.81 ccw(c4807.02,50.81) 4857.02,50.81 ; 4807.54,1728.08 cw(c4807.54,1678.08) 4857.54,1678.08 ; 4812.51,1728.59 4857.02,1728.59 ; 4812.77,1.07 4857.28,1.07 ; 4857.28,1683.83 4857.28,1728.34 ; 4857.54,1.33 4857.54,45.84
  lines w10: 0.12,52.53 0.12,1677.14 ; 0.65,50.81 ccw(c50.13,50.6) 50.35,1.11 ; 0.65,1677.87 cw(c50.13,1678.08) 50.35,1727.56 ; 49.57,0.96 4807.32,0.96 ; 50.57,1727.79 171.23,1727.79 ; 171.53,1728.55 cw(c171.74,1679.06) 221.23,1678.85 ; 221.81,1578.29 221.82,1677.14 ; 221.81,1580 1155.13,1580 ; 1155.13,1578.29 1155.13,1677.56 ; 1155.65,1677.87 cw(c1205.13,1678.08) 1205.35,1727.56 ; 1205.24,1727.56 4809.96,1727.56 ; 4807.32,1.11 ccw(c4807.54,50.6) 4857.02,50.81 ; 4807.32,1727.56 cw(c4807.54,1678.08) 4857.02,1677.87 ; 4857.23,51.33 4857.23,1677.56

## Other copper
Top Layer:
  pour cut-out: 1070,70 1070,10 2405,10 2600,205 2700,205 2700,195 2710,185 2740,185 2750,195 2750,215 2720,245 2585,245 2410,70

## Silkscreen, mask and mechanical layers (free items; w line width, h text height)
Top Overlay:
  drawing of 13 lines, arcs and shapes, not listed
  text "CAN Spule" at 1588.31,1598.08 h30
  text "User LED" at 308.24,1382.64 h30
  text "Wake Up" at 2565,1285 h30
  text "CAN Tran" at 1241.5,1230.41 h30 r90
  text "3V Reg" at 1466.22,1180 h30
  text "Feedback" at 2565,1175 h30
  text "3V3" at 1690,1125.94 h30 r90
  text "3V" at 1319.02,1059.54 h30
  text "BAT+" at 2064.76,1010.68 h30
  text "3V3 Reg" at 2075,935 h30 r270
  text "3V3" at 1615,925.47 h30
  text "3V" at 1399.06,865 h30
  text "REGOUT" at 1480.47,491 h25
  text "Jumper" at 1464.53,275 h30
  text "LV-BMS_V3 05.2021" at 1744.4,95.89 h28.44
  text "Ping-Cheng Wei" at 1744.4,47.31 h28.44